# Altium PCB led.PcbDoc (part 1 of 2)
Units mm, origin at the board's own origin, x right, y up, seen from the top; angles counter-clockwise.
Board outline 15 x 336 mm, 2 copper layers (Top Layer, Bottom Layer); 132 components, 245 nets, 940 pads, 191 vias.
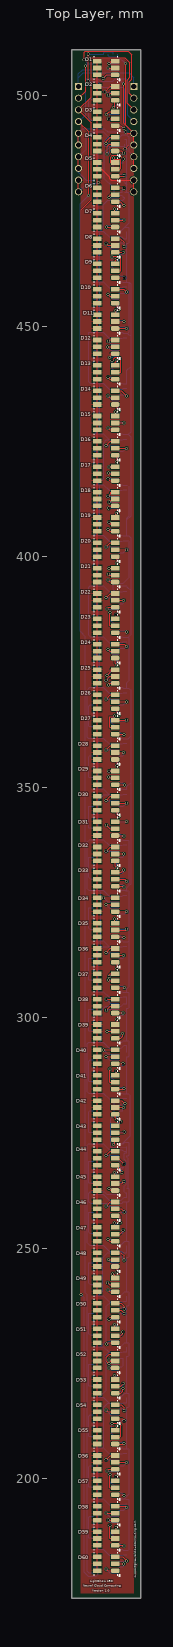
[diagram p0: Top Layer view]
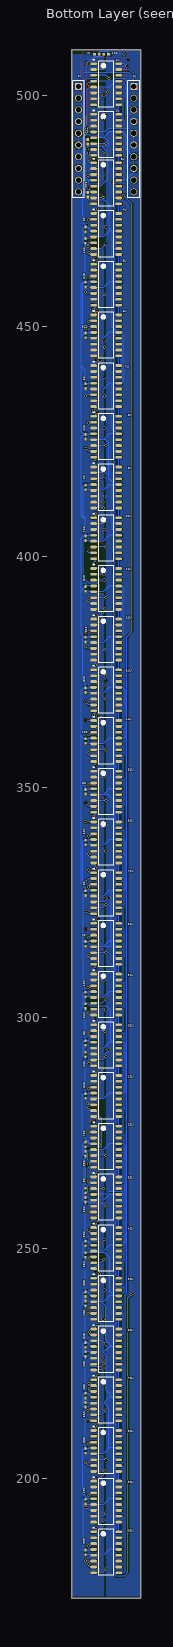
[diagram p1: Bottom Layer view, seen from below]

## Layer stack, top to bottom
Top Solder: solder mask 0.0102, Solder Resist, Dk 3.5
Top Layer: signal copper 0.0356
Dielectric 1: dielectric 0.32, FR-4, Dk 4.8
Bottom Layer: signal copper 0.0356
Bottom Solder: solder mask 0.0102, Solder Resist, Dk 3.5

## Board outline
1015.5,510 1015.5,174 1030.5,174 1030.5,510 1020,510

## Design rules (kind name [scope] priority, off if disabled: settings)
Clearance [All] p1: gap=0.127
PolygonConnect [All] p1: connectstyle=Relief reliefconductorwidth=0.254 reliefentries=4 polygonreliefangle="90 Angle" airgapwidth=0.254
RoomDefinition Sheet1 [InComponentClass('Sheet1')] p1: confinementstyle=ConfineIn formatcopy=TRUE lockcomponents=FALSE outline 0,0 50.8,0 50.8,25.4 0,25.4
RoutingLayers RoutingLayers_VCCBAT [InNet('VCCBAT')] p1 off: top layer_v5=TRUE bottom layer_v5=FALSE
RoutingLayers RoutingLayers_VCC [InNet('VCC')] p2 off: top layer_v5=TRUE bottom layer_v5=FALSE
RoutingLayers RoutingLayers_GND [InNet('GND')] p3 off: top layer_v5=FALSE bottom layer_v5=TRUE
RoutingLayers [All] p4: top layer_v5=TRUE bottom layer_v5=TRUE
RoutingVias [All] p1: holewidth=0.457 width=0.635 viastyle="Through Hole" minholewidth=0.457 minwidth=0.635 maxholewidth=0.457 maxwidth=0.635
SolderMaskExpansion [All] p1: expansion=0.102
Width [All] p1: maxlimit=0.254 minlimit=0.254 preferedwidth=0.254
29 further rules are at their usual default settings.

## Components (designator, comment, footprint, x,y, rotation, side; value= is the part's Value field where it differs from the comment)
C1 "Cap Semi" 0402 1025,509 r180 bottom
C2 "Cap Semi" 0402 1027.5,471 r270 bottom
C3 "Cap Semi" 0402 1027.5,437 r270 bottom
C4 "Cap Semi" 0402 1027.5,415 r270 bottom
C5 "Cap Semi" 0402 1027.5,327 r270 bottom
C6 "Cap Semi" 0402 1027.5,349 r270 bottom
C7 "Cap Semi" 0402 1027.5,316 r270 bottom
C8 "Cap Semi" 0402 1027.5,294.5 r270 bottom
C9 "Cap Semi" 0402 1027.5,262.5 r270 bottom
C10 "Cap Semi" 0402 1027.5,229 r270 bottom
C11 "Cap Semi" 0402 1023,509 r0 bottom
C12 "Cap Semi" 0402 1027,490 r90 bottom
C13 "Cap Semi" 0402 1027,478.5 r90 bottom
C14 "Cap Semi" 0402 1027.5,468.5 r270 bottom
C15 "Cap Semi" 0402 1027.5,459 r90 bottom
C16 "Cap Semi" 0402 1027.5,448 r90 bottom
C17 "Cap Semi" 0402 1027.5,404 r90 bottom
C18 "Cap Semi" 0402 1027.5,393 r90 bottom
C19 "Cap Semi" 0402 1027.5,382 r90 bottom
C20 "Cap Semi" 0402 1027.5,371 r90 bottom
C21 "Cap Semi" 0402 1027.5,360 r270 bottom
C22 "Cap Semi" 0402 1027.5,426 r270 bottom
C23 "Cap Semi" 0402 1027.5,338 r270 bottom
C24 "Cap Semi" 0402 1027.5,305 r270 bottom
C25 "Cap Semi" 0402 1027.5,292 r90 bottom
C26 "Cap Semi" 0402 1027.5,283 r270 bottom
C27 "Cap Semi" 0402 1027.5,272.5 r270 bottom
C28 "Cap Semi" 0402 1027.5,260.5 r90 bottom
C29 "Cap Semi" 0402 1027.5,251 r270 bottom
C30 "Cap Semi" 0402 1027.5,240 r270 bottom
C31 "Cap Semi" 0402 1027.5,227 r270 bottom
C32 "Cap Semi" 0402 1027.5,218 r90 bottom
C33 "Cap Semi" 0402 1027.5,206 r90 bottom
C34 "Cap Semi" 0402 1027.5,195 r90 bottom
C35 "Cap Semi" 0402 1027.5,184 r90 bottom
C36 "Cap Semi" 0402 1027.5,216 r270 bottom
C37 "Cap Semi" 0402 1027.5,238 r270 bottom
C38 "Cap Semi" 0402 1027.5,248.5 r270 bottom
C39 "Cap Semi" 0402 1027.5,270.5 r270 bottom
C40 "Cap Semi" 0402 1027.5,302.5 r270 bottom
D1 "Wayjun5050SMD" SON150P500X150_HS-7N 1023,506 r0 top
D2 "Wayjun5050SMD" SON150P500X150_HS-7N 1023,500.5 r0 top
D3 "Wayjun5050SMD" SON150P500X150_HS-7N 1023,495 r0 top
D4 "Wayjun5050SMD" SON150P500X150_HS-7N 1023,489.5 r0 top
D5 "Wayjun5050SMD" SON150P500X150_HS-7N 1023,484 r0 top
D6 "Wayjun5050SMD" SON150P500X150_HS-7N 1023,478.5 r0 top
D7 "Wayjun5050SMD" SON150P500X150_HS-7N 1023,473 r0 top
D8 "Wayjun5050SMD" SON150P500X150_HS-7N 1023,467.5 r0 top
D9 "Wayjun5050SMD" SON150P500X150_HS-7N 1023,462 r0 top
D10 "Wayjun5050SMD" SON150P500X150_HS-7N 1023,456.5 r0 top
D11 "Wayjun5050SMD" SON150P500X150_HS-7N 1023,451 r0 top
D12 "Wayjun5050SMD" SON150P500X150_HS-7N 1023,445.5 r0 top
D13 "Wayjun5050SMD" SON150P500X150_HS-7N 1023,440 r0 top
D14 "Wayjun5050SMD" SON150P500X150_HS-7N 1023,434.5 r0 top
D15 "Wayjun5050SMD" SON150P500X150_HS-7N 1023,429 r0 top
D16 "Wayjun5050SMD" SON150P500X150_HS-7N 1023,423.5 r0 top
D17 "Wayjun5050SMD" SON150P500X150_HS-7N 1023,418 r0 top
D18 "Wayjun5050SMD" SON150P500X150_HS-7N 1023,412.5 r0 top
D19 "Wayjun5050SMD" SON150P500X150_HS-7N 1023,407 r0 top
D20 "Wayjun5050SMD" SON150P500X150_HS-7N 1023,401.5 r0 top
D21 "Wayjun5050SMD" SON150P500X150_HS-7N 1023,396 r0 top
D22 "Wayjun5050SMD" SON150P500X150_HS-7N 1023,390.5 r0 top
D23 "Wayjun5050SMD" SON150P500X150_HS-7N 1023,385 r0 top
D24 "Wayjun5050SMD" SON150P500X150_HS-7N 1023,379.5 r0 top
D25 "Wayjun5050SMD" SON150P500X150_HS-7N 1023,374 r0 top
D26 "Wayjun5050SMD" SON150P500X150_HS-7N 1023,368.5 r0 top
D27 "Wayjun5050SMD" SON150P500X150_HS-7N 1023,363 r0 top
D28 "Wayjun5050SMD" SON150P500X150_HS-7N 1023,357.5 r0 top
D29 "Wayjun5050SMD" SON150P500X150_HS-7N 1023,352 r0 top
D30 "Wayjun5050SMD" SON150P500X150_HS-7N 1023,346.5 r0 top
D31 "Wayjun5050SMD" SON150P500X150_HS-7N 1023,341 r0 top
D32 "Wayjun5050SMD" SON150P500X150_HS-7N 1023,335.5 r0 top
D33 "Wayjun5050SMD" SON150P500X150_HS-7N 1023,330 r0 top
D34 "Wayjun5050SMD" SON150P500X150_HS-7N 1023,324.5 r0 top
D35 "Wayjun5050SMD" SON150P500X150_HS-7N 1023,319 r0 top
D36 "Wayjun5050SMD" SON150P500X150_HS-7N 1023,313.5 r0 top
D37 "Wayjun5050SMD" SON150P500X150_HS-7N 1023,308 r0 top
D38 "Wayjun5050SMD" SON150P500X150_HS-7N 1023,302.5 r0 top
D39 "Wayjun5050SMD" SON150P500X150_HS-7N 1023,297 r0 top
D40 "Wayjun5050SMD" SON150P500X150_HS-7N 1023,291.5 r0 top
D41 "Wayjun5050SMD" SON150P500X150_HS-7N 1023,286 r0 top
D42 "Wayjun5050SMD" SON150P500X150_HS-7N 1023,280.5 r0 top
D43 "Wayjun5050SMD" SON150P500X150_HS-7N 1023,275 r0 top
D44 "Wayjun5050SMD" SON150P500X150_HS-7N 1023,269.5 r0 top
D45 "Wayjun5050SMD" SON150P500X150_HS-7N 1023,264 r0 top
D46 "Wayjun5050SMD" SON150P500X150_HS-7N 1023,258.5 r0 top
D47 "Wayjun5050SMD" SON150P500X150_HS-7N 1023,253 r0 top
D48 "Wayjun5050SMD" SON150P500X150_HS-7N 1023,247.5 r0 top
D49 "Wayjun5050SMD" SON150P500X150_HS-7N 1023,242 r0 top
D50 "Wayjun5050SMD" SON150P500X150_HS-7N 1023,236.5 r0 top
D51 "Wayjun5050SMD" SON150P500X150_HS-7N 1023,231 r0 top
D52 "Wayjun5050SMD" SON150P500X150_HS-7N 1023,225.5 r0 top
D53 "Wayjun5050SMD" SON150P500X150_HS-7N 1023,220 r0 top
D54 "Wayjun5050SMD" SON150P500X150_HS-7N 1023,214.5 r0 top
D55 "Wayjun5050SMD" SON150P500X150_HS-7N 1023,209 r0 top
D56 "Wayjun5050SMD" SON150P500X150_HS-7N 1023,203.5 r0 top
D57 "Wayjun5050SMD" SON150P500X150_HS-7N 1023,198 r0 top
D58 "Wayjun5050SMD" SON150P500X150_HS-7N 1023,192.5 r0 top
D59 "Wayjun5050SMD" SON150P500X150_HS-7N 1023,187 r0 top
D60 "Wayjun5050SMD" SON150P500X150_HS-7N 1023,181.5 r0 top
J1 "PPTC101LFBN-RC" PPTC101LFBN-RC 1017,502 r270 bottom
J2 "PPTC101LFBN-RC" PPTC101LFBN-RC 1029,502 r270 bottom
U1 "LPD8806" SOP127P600-8N 1023,502.5 r180 bottom
U2 "LPD8806" SOP127P600-8N 1023,491.5 r180 bottom
U3 "LPD8806" SOP127P600-8N 1023,481 r180 bottom
U4 "LPD8806" SOP127P600-8N 1023,470 r180 bottom
U5 "LPD8806" SOP127P600-8N 1023,459 r180 bottom
U6 "LPD8806" SOP127P600-8N 1023,448 r180 bottom
U7 "LPD8806" SOP127P600-8N 1023,437 r180 bottom
U8 "LPD8806" SOP127P600-8N 1023,426 r180 bottom
U9 "LPD8806" SOP127P600-8N 1023,415 r180 bottom
U10 "LPD8806" SOP127P600-8N 1023,404 r180 bottom
U11 "LPD8806" SOP127P600-8N 1023,393 r180 bottom
U12 "LPD8806" SOP127P600-8N 1023,382 r180 bottom
U13 "LPD8806" SOP127P600-8N 1023,371 r180 bottom
U14 "LPD8806" SOP127P600-8N 1023,360 r180 bottom
U15 "LPD8806" SOP127P600-8N 1023,349 r180 bottom
U16 "LPD8806" SOP127P600-8N 1023,338 r180 bottom
U17 "LPD8806" SOP127P600-8N 1023,327 r180 bottom
U18 "LPD8806" SOP127P600-8N 1023,316 r180 bottom
U19 "LPD8806" SOP127P600-8N 1023,305 r180 bottom
U20 "LPD8806" SOP127P600-8N 1023,294 r180 bottom
U21 "LPD8806" SOP127P600-8N 1023,283 r180 bottom
U22 "LPD8806" SOP127P600-8N 1023,272 r180 bottom
U23 "LPD8806" SOP127P600-8N 1023,261 r180 bottom
U24 "LPD8806" SOP127P600-8N 1023,250 r180 bottom
U25 "LPD8806" SOP127P600-8N 1023,239 r180 bottom
U26 "LPD8806" SOP127P600-8N 1023,228 r180 bottom
U27 "LPD8806" SOP127P600-8N 1023,217 r180 bottom
U28 "LPD8806" SOP127P600-8N 1023,206 r180 bottom
U29 "LPD8806" SOP127P600-8N 1023,195 r180 bottom
U30 "LPD8806" SOP127P600-8N 1023,184 r180 bottom

## Footprints (in the part's own frame and the unit in brackets; to place one, negate y for a bottom-side part, rotate by r counter-clockwise, add the part's x,y. Pads: shape width x height; smd on the part's side, far side on the other; paste and mask are expansions set on the pad)
0402 [mm] "Chip Capacitor, Body 1.0x0.5mm, IPC High Density"
  rect 0.6x0.5 smd: 1(-0.5,0) 2(0.5,0)
  body extent -0.55,-0.3 0.55,0.3, height 1.3
PPTC101LFBN-RC [mil] "Sullins 10 Pin .100 spacing Femal connector - Single Role"
  rect 60x60 hole 45: 1(0,0)
  round 60 hole 45: 2(100,0) 3(200,0) 4(300,0) 5(400,0) 6(500,0) 7(600,0) 8(700,0) 9(800,0) 10(900,0)
  silkscreen extent -50,-50 950,50
SON150P500X150_HS-7N [mm] "SON, 6-Leads, Body 5.00x5.00mm, Pitch 1.50mm, Thermal Pad 4.00x1.50mm, IPC Medium Density"
  rrect50% 1.8x1 smd: 1(1.96,-1.5)
  rect 1.8x1 smd: 2(1.96,0) 3(1.96,1.5) 4(-1.96,1.5) 5(-1.96,0) 6(-1.96,-1.5)
  silkscreen extent -2.54,-2.72 3.1,2.54
SOP127P600-8N [mm]
  oval 1.45x0.6 smd: 1(-2.725,4.445) 2(-2.725,3.175) 3(-2.725,1.905) 4(-2.725,0.635) 5(-2.725,-0.635) 6(-2.725,-1.905) 7(-2.725,-3.175) 8(-2.725,-4.445) 9(2.725,-4.445) 10(2.725,-3.175) 11(2.725,-1.905) 12(2.725,-0.635) 13(2.725,0.635) 14(2.725,1.905) 15(2.725,3.175) 16(2.725,4.445)
  silkscreen extent -2.85,-5 1.6,5.42, body extent -2,-5 2,5, height 1.75

## Part data
C1 C2 C3 C4 C5 C6 C7 C8 C9 C10 C11 C12 C13 C14 C15 C16 C17 C18 C19 C20 C21 C22 C23 C24 C25 C26 C27 C28 C29 C30 C31 C32 C33 C34 C35 C36 C37 C38 C39 C40: "Capacitor (Semiconductor SIM Model)"
J1 J2: "Sullins PPTC101LFBN-RC 10 Position Header Connector 0.100\" (2.54mm) Through Hole Tin"
U1 U2 U3 U4 U5 U6 U7 U8 U9 U10 U11 U12 U13 U14 U15 U16 U17 U18 U19 U20 U21 U22 U23 U24 U25 U26 U27 U28 U29 U30: "LPD8806 LED Driver"

## Via types
v1: diameter 0.635, hole 0.457, Top Layer to Bottom Layer, 191 vias

## Nets (pads, with @x,y where several pads share a name; then routed paths per layer and width w, separated by ;. In a path a pad name is that pad's centre, name@x,y a point inside that pad or via, vN(x,y) a via of type N, cw(c..) or ccw(c..) an arc to the next point about the centre after c; other vN are vias at no path point)
CLK0: J1.2 J2.2 U1.16 | length 33.1
  Top Layer w0.254: J1.2@1017,499.46 1018.54,501 v1(1018.54,506.425) ; v1(1018.21,507.797) 1018.21,509.372 1018.438,509.6 1027.786,509.6 1028.548,508.838 1028.548,503.53 1027.984,502.966 1027.984,500.476 J2.2@1029,499.46
  Bottom Layer w0.254: v1(1018.21,507.797) 1019.062,506.945 ; v1(1018.54,506.425) 1019.062,506.945 ; U1.16@1020.275,506.945 1019.062,506.945
CLK11: U10.9 U11.16 | length 2.1
  Bottom Layer w0.254: U11.16@1020.275,397.445 U10.9@1020.275,399.555
CLK21: U20.9 U21.16 | length 2.1
  Bottom Layer w0.254: U21.16@1020.275,287.445 U20.9@1020.275,289.555
CLK31: J1.4 J2.4 U30.9 | length 347.4
  Top Layer w0.254: J1.4@1017,494.38 1019.213,492.167 v1(1019.213,478.386)
  Bottom Layer w0.254: J1.4@1017,494.38 1018.534,495.914 1018.534,503.409 1018.845,503.72 1021.232,503.72 1021.791,503.161 1024.471,503.161 1025.017,503.707 1027.308,503.707 1027.633,503.382 1027.633,495.747 J2.4@1029,494.38 ; v1(1019.213,478.386) 1017.397,476.57 1017.397,383.79 1018.515,382.672 1018.515,240.259 1018.896,239.878 1018.896,179.86 1019.2,179.555 U30.9@1020.275,179.555
DAT0: J1.1 J2.1 U1.15 | length 21.2
  Bottom Layer w0.254: J1.1@1017,502 1017,503.936 ; U1.15@1020.275,505.675 1017.926,505.675 1017,504.749 1017,503.936 ; J2.1@1029,502 1029,503.936 1027.959,504.977 1018.041,504.977 1017,503.936
DAT11: U10.10 U11.15 | length 6.6
  Bottom Layer w0.254: U11.15@1020.275,396.175 1021.258,396.175 1021.258,400.825 U10.10@1020.275,400.825
DAT21: U20.10 U21.15 | length 6.5
  Bottom Layer w0.254: U21.15@1020.275,286.175 1019.277,286.175 1019.277,290.576 1019.526,290.825 U20.10@1020.275,290.825
DAT31: J1.3 J2.3 U30.10 | length 358.1
  Top Layer w0.254: v1(1017.575,239.903) 1017.575,475.209 1019.785,477.418 1019.785,494.135 J1.3@1017,496.92 1019.734,499.654 1019.734,508.127 1019.886,508.279 1027.074,508.279 1028.167,507.187 1028.167,503.961 1027.603,503.397 1027.603,498.317 J2.3@1029,496.92
  Bottom Layer w0.254: v1(1017.575,239.903) 1018.261,239.217 1018.261,179.629 1019.124,178.765 1020.801,178.765 1021.258,179.222 1021.258,180.825 U30.10@1020.275,180.825
GND: C1.2 C2.2 C3.2 C4.2 C5.2 C6.2 C7.2 C8.2 C9.2 C10.2 C11.1 C12.1 C13.1 C14.1 C15.1 C16.1 C17.1 C18.1 C19.1 C20.1 C21.2 C22.2 C23.2 C24.2 C25.2 C26.2 C27.2 C28.2 C29.2 C30.2 C31.1 C32.1 C33.1 C34.1 C35.1 C36.1 C37.1 C38.1 C39.1 C40.1 J1.7 J1.8 J2.7 J2.8 U1.5 U1.13 U2.5 U2.13 U3.5 U3.13 U4.5 U4.13 U5.5 U5.13 U6.5 U6.13 U7.5 U7.13 U8.5 U8.13 U9.5 U9.13 U10.5 U10.13 U11.5 U11.13 U12.5 U12.13 U13.5 U13.13 U14.5 U14.13 U15.5 U15.13 U16.5 U16.13 U17.5 U17.13 U18.5 U18.13 U19.5 U19.13 U20.5 U20.13 U21.5 U21.13 U22.5 U22.13 U23.5 U23.13 U24.5 U24.13 U25.5 U25.13 U26.5 U26.13 U27.5 U27.13 U28.5 U28.13 U29.5 U29.13 U30.5 U30.13 | length 646.1
  Top Layer w0.254: J1.8@1017,484.22 J1.7@1017,486.76 ; v1(1019.124,503.149) v1(1019.124,509) ; J2.8@1029,484.22 J2.7@1029,486.76
  Bottom Layer w0.254: J1.8@1017,484.22 1017,483.353 1018.718,481.635 U3.13@1020.275,481.635 ; J1.7@1017,486.76 1018.642,488.402 1018.642,491.322 1019.454,492.135 U2.13@1020.275,492.135 1022.35,492.135 1023.62,490.865 ; v1(1019.124,503.149) 1019.138,503.135 U1.13@1020.275,503.135 1021.034,503.135 1022.304,501.865 U1.5@1025.725,501.865 1026.566,501.865 1027.085,501.346 1027.085,493.782 1027.841,493.026 1027.841,491.812 1027.582,491.553 1027.341,491.553 ; v1(1019.124,509) C11.1@1022.5,509 1022.5,509.318 1022.706,509.524 1024.5,509.524 C1.2@1024.5,509 ; U30.13@1020.275,184.635 1021.258,184.635 ; U29.13@1020.275,195.635 1021.008,195.635 ; U28.13@1020.275,206.635 1021.258,206.635 ; U27.13@1020.275,217.635 1021.537,217.635 ; U26.13@1020.275,228.635 1021.69,228.635 ; U25.13@1020.275,239.635 1021.295,239.635 ; U23.13@1020.275,261.635 1022.35,261.635 1023.62,260.365 U23.5@1025.725,260.365 1026.287,260.365 1026.922,261 C28.2@1027.5,261 C9.2@1027.5,262 1027.176,262 1026.973,262.203 1026.973,263.448 1027.415,263.891 1027.415,268.871 1026.973,269.313 1026.973,270.485 1027.176,270.688 1027.5,270.688 C39.1@1027.5,271 ; U19.13@1020.275,305.635 1021.258,305.635 ; U18.13@1020.275,316.635 1021.005,316.635 ; U15.13@1020.275,349.635 1021.258,349.635 ; U10.13@1020.275,404.635 U10.13@1020.382,404.635 ; U9.13@1020.275,415.635 1021.095,415.635 ; U8.13@1020.275,426.635 U8.13@1020.487,426.635 ; U5.13@1020.275,459.635 1021.229,459.635 ; U4.13@1020.275,470.635 1021.209,470.635 ; U3.5@1025.725,480.365 1024.941,480.365 ; C12.1@1027,489.5 1027,489.052 1026.551,489.052 1026.525,489.026 1023.976,489.026 ; C35.1@1027.5,183.5 1026.676,183.5 1026.541,183.365 U30.5@1025.725,183.365 1023.62,183.365 1022.35,184.635 1021.258,184.635 ; C34.1@1027.5,194.5 1027.377,194.5 1027.377,194.365 U29.5@1025.725,194.365 1023.62,194.365 1022.35,195.635 1021.258,195.635 ; C33.1@1027.5,205.5 1026.676,205.5 1026.541,205.365 U28.5@1025.725,205.365 1023.62,205.365 1022.426,206.559 ; C32.1@1027.5,217.5 C36.1@1027.5,216.5 1026.676,216.5 1026.541,216.365 U27.5@1025.725,216.365 1023.62,216.365 ; C10.2@1027.5,228.5 C31.1@1027.5,227.5 1026.676,227.5 1026.541,227.365 U26.5@1025.725,227.365 1023.655,227.365 ; C30.2@1027.5,239.5 C37.1@1027.5,238.5 1026.676,238.5 1026.541,238.365 U25.5@1025.725,238.365 1024.089,238.365 ; C29.2@1027.5,250.5 C38.1@1027.5,249 1026.779,249 ; C26.2@1027.5,282.5 1026.541,282.5 ; C25.2@1027.5,292.5 C8.2@1027.5,294 1026.922,294 1026.287,293.365 U20.5@1025.725,293.365 1023.62,293.365 1022.35,294.635 1021.558,294.635 ; C7.2@1027.5,315.5 1026.676,315.5 1026.541,315.365 U18.5@1025.725,315.365 1023.62,315.365 ; C5.2@1027.5,326.5 1026.676,326.5 1026.541,326.365 U17.5@1025.725,326.365 1023.62,326.365 1022.35,327.635 1021.359,327.635 ; C23.2@1027.5,337.5 1026.676,337.5 1026.541,337.365 U16.5@1025.725,337.365 1023.62,337.365 1022.35,338.635 1021.258,338.635 ; C6.2@1027.5,348.5 1026.676,348.5 1026.541,348.365 U15.5@1025.725,348.365 1023.62,348.365 ; C21.2@1027.5,359.5 1026.676,359.5 1026.541,359.365 U14.5@1025.725,359.365 1023.62,359.365 1022.35,360.635 1021.258,360.635 ; C20.1@1027.5,370.5 1026.676,370.5 1026.541,370.365 U13.5@1025.725,370.365 1023.62,370.365 1022.35,371.635 U13.13@1020.478,371.635 ; C19.1@1027.5,381.5 1026.676,381.5 1026.541,381.365 U12.5@1025.725,381.365 1023.62,381.365 1022.35,382.635 1021.02,382.635 ; C18.1@1027.5,392.5 1026.676,392.5 1026.541,392.365 U11.5@1025.725,392.365 1024.941,392.365 ; C4.2@1027.5,414.5 1026.676,414.5 1026.541,414.365 U9.5@1025.725,414.365 1023.62,414.365 1022.35,415.635 1021.345,415.635 ; C22.2@1027.5,425.5 1026.676,425.5 1026.541,425.365 U8.5@1025.725,425.365 1023.62,425.365 ; C3.2@1027.5,436.5 1026.676,436.5 1026.541,436.365 U7.5@1025.725,436.365 1023.62,436.365 1022.35,437.635 1021.29,437.635 ; C16.1@1027.5,447.5 1026.676,447.5 1026.541,447.365 U6.5@1025.725,447.365 1023.62,447.365 1022.35,448.635 U6.13@1020.491,448.635 ; C15.1@1027.5,458.5 1026.676,458.5 1026.541,458.365 U5.5@1025.725,458.365 1023.62,458.365 1022.35,459.635 1021.283,459.635 ; C2.2@1027.5,470.5 C14.1@1027.5,469 1026.779,469 1026.414,469.365 U4.5@1025.725,469.365 1023.62,469.365 1022.35,470.635 1021.69,470.635 ; J2.7@1029,486.76 1027.963,487.797 1027.963,490.931 1027.341,491.553 ; U10.13@1020.382,404.635 1022.35,404.635 1023.62,403.365 U10.5@1025.725,403.365 1026.541,403.365 1026.676,403.5 C17.1@1027.5,403.5 1027.786,403.5 1028.014,403.271 1028.014,395.503 1026.719,394.208 1024.803,394.208 1024.534,393.94 1024.534,392.771 1024.941,392.365 ; U10.13@1020.382,404.635 1021.639,405.892 1021.639,415.341 1021.345,415.635 ; U13.13@1020.478,371.635 U13.13@1020.275,371.635 1019.487,371.635 1018.896,371.043 1018.896,360.864 1019.124,360.635 U14.13@1020.275,360.635 1021.258,360.635 ; U13.13@1020.478,371.635 1021.639,372.796 1021.639,382.016 1021.02,382.635 ; U8.13@1020.487,426.635 1022.35,426.635 1023.62,425.365 ; U8.13@1020.487,426.635 1021.639,427.787 1021.639,437.286 1021.29,437.635 ; U6.13@1020.491,448.635 U6.13@1020.275,448.635 1019.277,448.635 1019.277,437.896 1019.538,437.635 U7.13@1020.275,437.635 1021.29,437.635 ; U6.13@1020.491,448.635 1021.639,449.783 1021.639,459.279 1021.283,459.635 ; 1021.005,316.635 1021.842,316.635 ; 1021.005,316.635 1021.258,316.382 1021.258,305.635 ; 1021.008,195.635 1021.258,195.635 ; 1021.008,195.635 1021.258,195.885 1021.258,206.635 ; 1021.02,382.635 U12.13@1020.275,382.635 1019.538,382.635 1019.277,382.896 1019.277,393.395 1019.516,393.635 U11.13@1020.275,393.635 1022.35,393.635 1023.62,392.365 1024.941,392.365 ; 1021.095,415.635 1021.345,415.635 ; 1021.095,415.635 1022.426,416.966 1022.426,424.739 1023.052,425.365 1023.62,425.365 ; 1021.209,470.635 1021.69,470.635 ; 1021.209,470.635 1021.639,470.205 1021.639,460.045 1021.229,459.635 ; 1021.229,459.635 1021.283,459.635 ; 1021.258,184.635 1021.258,195.635 ; 1021.258,206.635 1022.35,206.635 1022.426,206.559 ; 1021.258,305.635 1022.35,305.635 1023.62,304.365 U19.5@1025.725,304.365 1026.541,304.365 1026.676,304.5 C24.2@1027.5,304.5 C40.1@1027.5,303 1026.846,303 1026.309,302.463 1022.883,302.463 1021.969,301.549 1021.969,295.046 1021.558,294.635 ; 1021.258,338.635 U16.13@1020.275,338.635 1019.406,338.635 1018.896,338.125 1018.896,327.965 1019.225,327.635 U17.13@1020.275,327.635 1021.359,327.635 ; 1021.258,338.635 1021.258,347.116 1022.506,348.365 1023.62,348.365 ; 1021.258,349.635 1022.35,349.635 1023.62,348.365 ; 1021.258,349.635 1021.258,360.635 ; 1021.295,239.635 1022.35,239.635 1023.62,238.365 1024.089,238.365 ; 1021.295,239.635 1022.248,240.589 1022.248,247.933 1023.315,249 1026.779,249 ; 1021.359,327.635 1021.842,327.152 1021.842,316.635 ; 1021.537,217.635 1022.35,217.635 1023.62,216.365 ; 1021.537,217.635 1023.023,219.121 1023.023,226.733 1023.655,227.365 ; 1021.558,294.635 U20.13@1020.275,294.635 1019.251,294.635 1018.896,294.279 1018.896,283.94 1019.2,283.635 U21.13@1020.275,283.635 1022.35,283.635 1023.62,282.365 U21.5@1025.725,282.365 1026.541,282.5 ; 1021.69,228.635 1022.35,228.635 1023.655,227.365 ; 1021.69,228.635 1023.061,230.007 1023.061,237.338 1024.089,238.365 ; 1021.69,470.635 1022.375,471.321 1022.375,476.326 1023.315,477.266 1026.566,477.266 1027,477.7 C13.1@1027,478 1026.719,478 1026.719,478.13 1026.414,478.434 1024.941,478.434 1024.738,478.638 1024.738,480.162 1024.941,480.365 ; 1021.842,316.635 1022.35,316.635 1023.62,315.365 ; 1021.842,316.635 1021.842,315.619 1022.096,315.365 1023.62,315.365 ; 1022.426,206.559 1022.426,215.476 1023.315,216.365 1023.62,216.365 ; 1023.62,490.865 U2.5@1025.725,490.865 1025.84,490.865 1026.528,491.553 1027.341,491.553 ; 1023.62,490.865 1023.315,490.865 1022.426,489.976 1022.426,489.306 1022.706,489.026 1023.976,489.026 ; 1023.976,489.026 1022.629,487.68 1022.629,482.016 1024.28,480.365 1024.941,480.365 ; 1026.541,282.5 1025.754,282.365 1025.737,282.351 1024.738,281.484 1024.738,278.808 1023.984,278.055 1023.984,271.92 1025.047,271.92 C27.2@1027.5,272 C39.1@1027.5,271 ; 1026.779,249 1026.414,249.365 U24.5@1025.725,249.365 1023.62,249.365 1022.35,250.635 U24.13@1020.275,250.635 1019.416,250.635 1018.896,251.155 1018.896,272.288 1019.243,272.635 U22.13@1020.275,272.635 1022.35,272.635 1023.62,271.365 U22.5@1025.725,271.365 1026.414,271.365 1026.779,271 C39.1@1027.5,271
NetD1_1: D1.1 U1.3 | length 6.5
  Top Layer w0.254: v1(1022.375,503.733) 1023.143,504.5 D1.1@1024.96,504.5
  Bottom Layer w0.254: v1(1022.375,503.733) 1023.048,504.405 U1.3@1025.725,504.405
NetD1_2: D1.2 U1.2 | length 4
  Top Layer w0.254: v1(1023.398,506) D1.2@1024.96,506
  Bottom Layer w0.254: v1(1023.398,506) 1023.723,505.675 U1.2@1025.725,505.675
NetD1_3: D1.3 U1.1 | length 3.7
  Top Layer w0.254: v1(1023.595,506.945) 1024.15,507.5 D1.3@1024.96,507.5
  Bottom Layer w0.254: v1(1023.595,506.945) U1.1@1025.725,506.945
NetD2_1: D2.1 U1.8 | length 3.1
  Top Layer w0.254: v1(1024.611,497.459) 1024.839,497.688 1024.839,499 D2.1@1024.96,499
  Bottom Layer w0.254: v1(1024.611,497.459) 1024.7,497.459 1025.296,498.055 U1.8@1025.725,498.055
NetD2_2: D2.2 U1.7 | length 4.2
  Top Layer w0.254: v1(1023.493,500.094) 1023.899,500.5 D2.2@1024.96,500.5
  Bottom Layer w0.254: v1(1023.493,500.094) 1024.262,499.325 U1.7@1025.725,499.325
NetD2_3: D2.3 U1.6 | length 5.9
  Top Layer w0.254: v1(1022.706,500.786) 1023.919,502 D2.3@1024.96,502
  Bottom Layer w0.254: v1(1022.706,500.786) 1023.874,500.786 1024.065,500.595 U1.6@1025.725,500.595
NetD3_1: D3.1 U2.3 | length 3.4
  Top Layer w0.254: D3.1@1024.96,493.5 1026.207,493.5 v1(1026.82,492.887)
  Bottom Layer w0.254: U2.3@1025.725,493.405 1026.302,493.405 v1(1026.82,492.887)
NetD3_2: D3.2 U2.2 | length 3.7
  Top Layer w0.254: v1(1023.554,495) D3.2@1024.96,495
  Bottom Layer w0.254: v1(1023.554,495) 1023.879,494.675 U2.2@1025.725,494.675
NetD3_3: D3.3 U2.1 | length 4.7
  Top Layer w0.254: v1(1023.087,495.945) 1023.642,496.5 D3.3@1024.96,496.5
  Bottom Layer w0.254: v1(1023.087,495.945) U2.1@1025.725,495.945
NetD4_1: D4.1 U2.8 | length 3.4
  Top Layer w0.254: D4.1@1024.96,488 1026.297,488 v1(1026.795,487.502)
  Bottom Layer w0.254: U2.8@1025.725,487.055 1026.795,487.274 v1(1026.795,487.502)
NetD4_2: D4.2 U2.7 | length 6.5
  Top Layer w0.254: v1(1023.214,487.375) 1023.214,488.992 1023.722,489.5 D4.2@1024.96,489.5
  Bottom Layer w0.254: v1(1023.214,487.375) 1024.163,488.325 U2.7@1025.725,488.325
NetD4_3: D4.3 U2.6 | length 5.5
  Top Layer w0.254: v1(1023.01,489.61) 1023.01,490.118 1023.892,491 D4.3@1024.96,491
  Bottom Layer w0.254: v1(1023.01,489.61) 1023.026,489.595 U2.6@1025.725,489.595
NetD5_1: D5.1 U3.3 | length 3.3
  Top Layer w0.254: D5.1@1024.96,482.5 1026.72,482.5 v1(1026.922,482.702)
  Bottom Layer w0.254: U3.3@1025.725,482.905 1026.719,482.905 v1(1026.922,482.702)
NetD5_2: D5.2 U3.2 | length 8.3
  Top Layer w0.254: v1(1024.56,486.461) 1024.763,486.258 1026.135,486.258 1026.135,484.226 1025.909,484 D5.2@1024.96,484
  Bottom Layer w0.254: v1(1024.56,486.461) 1024.56,484.429 1024.814,484.175 U3.2@1025.725,484.175
NetD5_3: D5.3 U3.1 | length 7.2
  Top Layer w0.254: D5.3@1024.96,485.5 1023.976,485.5 1023.976,486.689 1024.331,487.045 1025.931,487.045 v1(1026.719,486.258)
  Bottom Layer w0.254: U3.1@1025.725,485.445 1026.719,485.445 v1(1026.719,486.258)
NetD6_1: D6.1 U3.8 | length 3.5
  Top Layer w0.254: D6.1@1024.96,477 1026.02,477 v1(1026.846,476.174)
  Bottom Layer w0.254: U3.8@1025.725,476.555 1026.465,476.555 v1(1026.846,476.174)
NetD6_2: D6.2 U3.7 | length 3.8
  Top Layer w0.254: v1(1023.645,477.952) 1023.645,478.221 1023.925,478.5 D6.2@1024.96,478.5
  Bottom Layer w0.254: v1(1023.645,477.952) 1023.772,477.825 U3.7@1025.725,477.825
NetD6_3: D6.3 U3.6 | length 3.6
  Top Layer w0.254: D6.3@1024.96,480 1026.728,480 v1(1026.82,479.908)
  Bottom Layer w0.254: U3.6@1025.725,479.095 1026.439,479.095 1026.439,479.527 v1(1026.82,479.908)
NetD7_1: D7.1 U4.3 | length 4.7
  Top Layer w0.254: v1(1023.087,471.5) D7.1@1024.96,471.5
  Bottom Layer w0.254: v1(1023.087,471.5) 1023.492,471.905 U4.3@1025.725,471.905
NetD7_2: D7.2 U4.2 | length 3.1
  Top Layer w0.254: D7.2@1024.96,473 v1(1026.847,473)
  Bottom Layer w0.254: U4.2@1025.725,473.175 1026.672,473.175 v1(1026.847,473)
NetD7_3: D7.3 U4.1 | length 2.7
  Top Layer w0.254: v1(1024.839,475.412) 1024.839,474.5 D7.3@1024.96,474.5
  Bottom Layer w0.254: v1(1024.839,475.412) 1024.966,475.412 1025.296,475.082 1025.296,474.445 U4.1@1025.725,474.445
NetD8_1: D8.1 U4.8 | length 3.2
  Top Layer w0.254: D8.1@1024.96,466 v1(1026.719,466)
  Bottom Layer w0.254: U4.8@1025.725,465.555 1026.719,465.555 v1(1026.719,466)
NetD8_2: D8.2 U4.7 | length 5.2
  Top Layer w0.254: v1(1023.01,467.868) 1023.378,467.5 D8.2@1024.96,467.5
  Bottom Layer w0.254: v1(1023.01,467.868) 1024.053,466.825 U4.7@1025.725,466.825
NetD8_3: D8.3 U4.6 | length 5.1
  Top Layer w0.254: D8.3@1024.96,469 1026.095,469 1026.922,468.173 v1(1026.922,467.258)
  Bottom Layer w0.254: U4.6@1025.725,468.095 1026.643,468.095 1026.922,467.816 v1(1026.922,467.258)
NetD9_1: D9.1 U5.3 | length 3.3
  Top Layer w0.254: D9.1@1024.96,460.5 v1(1026.922,460.5)
  Bottom Layer w0.254: U5.3@1025.725,460.905 1026.517,460.905 v1(1026.922,460.5)
NetD9_2: D9.2 U5.2 | length 10.1
  Top Layer w0.254: v1(1024.306,464.998) 1024.522,465.214 1026.035,465.214 1026.135,465.114 1026.135,462 D9.2@1024.96,462
  Bottom Layer w0.254: v1(1024.306,464.998) 1024.306,462.81 1024.941,462.175 U5.2@1025.725,462.175
NetD9_3: D9.3 U5.1 | length 2.7
  Top Layer w0.254: D9.3@1024.96,463.5 1024.941,463.5 1024.941,464.21 v1(1025.373,464.642)
  Bottom Layer w0.254: v1(1025.373,464.642) 1025.398,464.642 1025.728,464.312 1025.728,463.445 U5.1@1025.725,463.445
NetD10_1: D10.1 U5.8 | length 3.4
  Top Layer w0.254: D10.1@1024.96,455 1025.373,455 1025.373,454.05 v1(1025.779,453.644)
  Bottom Layer w0.254: U5.8@1025.725,454.555 1025.373,454.555 1025.373,453.965 1025.694,453.644 v1(1025.779,453.644)
NetD10_2: D10.2 U5.7 | length 4.5
  Top Layer w0.254: v1(1023.391,456.87) 1023.761,456.5 D10.2@1024.96,456.5
  Bottom Layer w0.254: v1(1023.391,456.87) 1024.436,455.825 U5.7@1025.725,455.825
NetD10_3: D10.3 U5.6 | length 4.6
  Top Layer w0.254: D10.3@1024.96,458 1026.859,458 v1(1027.455,457.403)
  Bottom Layer w0.254: U5.6@1025.725,457.095 1027.147,457.095 v1(1027.455,457.403)
NetD11_1: D11.1 U6.3 | length 4.4
  Top Layer w0.254: D11.1@1024.96,449.5 v1(1027.455,449.5)
  Bottom Layer w0.254: U6.3@1025.725,449.905 1027.05,449.905 v1(1027.455,449.5)
NetD11_2: D11.2 U6.2 | length 3.1
  Top Layer w0.254: D11.2@1024.96,451 v1(1026.843,451)
  Bottom Layer w0.254: U6.2@1025.725,451.175 1026.668,451.175 v1(1026.843,451)
NetD11_3: D11.3 U6.1 | length 2.5
  Top Layer w0.254: D11.3@1024.96,452.5 1025.042,452.5 v1(1025.042,453.415)
  Bottom Layer w0.254: v1(1025.042,453.415) 1025.296,453.161 1025.296,452.445 U6.1@1025.725,452.445
NetD12_1: D12.1 U6.8 | length 4
  Top Layer w0.254: v1(1023.747,443.205) 1023.899,443.357 1023.899,444 D12.1@1024.96,444
  Bottom Layer w0.254: v1(1023.747,443.205) 1024.463,443.205 1024.814,443.555 U6.8@1025.725,443.555
NetD12_2: D12.2 U6.7 | length 4.3
  Top Layer w0.254: v1(1023.315,445.5) D12.2@1024.96,445.5
  Bottom Layer w0.254: v1(1023.315,445.5) 1023.99,444.825 U6.7@1025.725,444.825
NetD12_3: D12.3 U6.6 | length 4.1
  Top Layer w0.254: v1(1023.483,446.725) 1023.758,447 D12.3@1024.96,447
  Bottom Layer w0.254: v1(1023.483,446.725) 1024.113,446.095 U6.6@1025.725,446.095
NetD13_1: D13.1 U7.3 | length 4
  Top Layer w0.254: v1(1023.411,438.905) 1023.816,438.5 D13.1@1024.96,438.5
  Bottom Layer w0.254: v1(1023.411,438.905) U7.3@1025.725,438.905
NetD13_2: D13.2 U7.2 | length 9.9
  Top Layer w0.254: v1(1024.306,442.595) 1024.928,443.217 1026.049,443.217 1026.135,443.131 1026.135,440 D13.2@1024.96,440
  Bottom Layer w0.254: v1(1024.306,442.595) 1024.306,440.81 1024.941,440.175 U7.2@1025.725,440.175
NetD13_3: D13.3 U7.1 | length 2.9
  Top Layer w0.254: D13.3@1024.96,441.5 1024.941,441.5 1024.941,442.214 v1(1025.373,442.646)
  Bottom Layer w0.254: v1(1025.373,442.646) 1025.373,441.445 U7.1@1025.725,441.445
NetD14_1: D14.1 U7.8 | length 3.4
  Top Layer w0.254: D14.1@1024.96,433 1025.373,433 1025.373,432.054 v1(1025.779,431.648)
  Bottom Layer w0.254: U7.8@1025.725,432.555 1025.373,432.555 1025.373,431.965 1025.69,431.648 v1(1025.779,431.648)
NetD14_2: D14.2 U7.7 | length 4.5
  Top Layer w0.254: v1(1023.391,434.873) 1023.765,434.5 D14.2@1024.96,434.5
  Bottom Layer w0.254: v1(1023.391,434.873) 1024.44,433.825 U7.7@1025.725,433.825
NetD14_3: D14.3 U7.6 | length 4.8
  Top Layer w0.254: D14.3@1024.96,436 1026.303,436 v1(1027.455,434.848)
  Bottom Layer w0.254: U7.6@1025.725,435.095 1027.208,435.095 v1(1027.455,434.848)
NetD15_1: D15.1 U8.3 | length 4
  Top Layer w0.254: v1(1023.409,427.905) 1023.814,427.5 D15.1@1024.96,427.5
  Bottom Layer w0.254: v1(1023.409,427.905) U8.3@1025.725,427.905
NetD15_2: D15.2 U8.2 | length 3.1
  Top Layer w0.254: D15.2@1024.96,429 v1(1026.84,429)
  Bottom Layer w0.254: U8.2@1025.725,429.175 1026.665,429.175 v1(1026.84,429)
NetD15_3: D15.3 U8.1 | length 2.5
  Top Layer w0.254: D15.3@1024.96,430.5 1025.042,430.5 v1(1025.042,431.419)
  Bottom Layer w0.254: v1(1025.042,431.419) 1025.296,431.165 1025.296,430.445 U8.1@1025.725,430.445
NetD16_1: D16.1 U8.8 | length 3.1
  Top Layer w0.254: D16.1@1024.96,422 1025.373,422 v1(1025.373,420.624)
  Bottom Layer w0.254: v1(1025.373,420.624) 1025.373,421.555 U8.8@1025.725,421.555
NetD16_2: D16.2 U8.7 | length 4.5
  Top Layer w0.254: D16.2@1024.96,423.5 v1(1027.43,423.5)
  Bottom Layer w0.254: U8.7@1025.725,422.825 1026.755,422.825 v1(1027.43,423.5)
NetD16_3: D16.3 U8.6 | length 5
  Top Layer w0.254: v1(1023.01,424.095) 1023.915,425 D16.3@1024.96,425
  Bottom Layer w0.254: v1(1023.01,424.095) U8.6@1025.725,424.095
NetD17_1: D17.1 U9.3 | length 4
  Top Layer w0.254: v1(1023.408,416.905) 1023.813,416.5 D17.1@1024.96,416.5
  Bottom Layer w0.254: v1(1023.408,416.905) U9.3@1025.725,416.905
NetD17_2: D17.2 U9.2 | length 3.8
  Top Layer w0.254: v1(1023.499,418.175) 1023.674,418 D17.2@1024.96,418
  Bottom Layer w0.254: v1(1023.499,418.175) U9.2@1025.725,418.175
NetD17_3: D17.3 U9.1 | length 3.4
  Top Layer w0.254: v1(1023.645,419.445) 1023.7,419.5 D17.3@1024.96,419.5
  Bottom Layer w0.254: v1(1023.645,419.445) U9.1@1025.725,419.445
NetD18_1: D18.1 U9.8 | length 3.8
  Top Layer w0.254: v1(1023.556,410.527) 1024.029,411 D18.1@1024.96,411
  Bottom Layer w0.254: v1(1023.556,410.527) 1023.584,410.555 U9.8@1025.725,410.555
NetD18_2: D18.2 U9.7 | length 3.6
  Top Layer w0.254: v1(1023.671,411.825) 1024.346,412.5 D18.2@1024.96,412.5
  Bottom Layer w0.254: v1(1023.671,411.825) U9.7@1025.725,411.825
NetD18_3: D18.3 U9.6 | length 4.5
  Top Layer w0.254: v1(1023.391,413.095) 1023.976,413.679 1023.976,414 D18.3@1024.96,414
  Bottom Layer w0.254: v1(1023.391,413.095) U9.6@1025.725,413.095
NetD19_1: D19.1 U10.3 | length 4
  Top Layer w0.254: v1(1023.406,405.905) 1023.811,405.5 D19.1@1024.96,405.5
  Bottom Layer w0.254: v1(1023.406,405.905) U10.3@1025.725,405.905
NetD19_2: D19.2 U10.2 | length 3.8
  Top Layer w0.254: v1(1023.645,407.467) 1023.645,407.365 1024.011,407 D19.2@1024.96,407
  Bottom Layer w0.254: v1(1023.645,407.467) 1023.937,407.175 U10.2@1025.725,407.175
NetD19_3: D19.3 U10.1 | length 2.5
  Top Layer w0.254: D19.3@1024.96,408.5 1025.068,408.5 1025.068,409.169 v1(1025.296,409.397)
  Bottom Layer w0.254: v1(1025.296,409.397) 1025.296,408.445 U10.1@1025.725,408.445
NetD20_1: D20.1 U10.8 | length 3.1
  Top Layer w0.254: D20.1@1024.96,400 1025.373,400 v1(1025.373,398.628)
  Bottom Layer w0.254: v1(1025.373,398.628) 1025.373,399.555 U10.8@1025.725,399.555
NetD20_2: D20.2 U10.7 | length 4.5
  Top Layer w0.254: D20.2@1024.96,401.5 v1(1027.43,401.5)
  Bottom Layer w0.254: U10.7@1025.725,400.825 1026.755,400.825 v1(1027.43,401.5)
NetD20_3: D20.3 U10.6 | length 5
  Top Layer w0.254: v1(1023.01,402.095) 1023.915,403 D20.3@1024.96,403
  Bottom Layer w0.254: v1(1023.01,402.095) U10.6@1025.725,402.095
NetD21_1: D21.1 U11.3 | length 4
  Top Layer w0.254: v1(1023.404,394.905) 1023.809,394.5 D21.1@1024.96,394.5
  Bottom Layer w0.254: v1(1023.404,394.905) U11.3@1025.725,394.905
NetD21_2: D21.2 U11.2 | length 3.8
  Top Layer w0.254: v1(1023.497,396.175) 1023.672,396 D21.2@1024.96,396
  Bottom Layer w0.254: v1(1023.497,396.175) U11.2@1025.725,396.175
NetD21_3: D21.3 U11.1 | length 3.4
  Top Layer w0.254: v1(1023.645,397.445) 1023.7,397.5 D21.3@1024.96,397.5
  Bottom Layer w0.254: v1(1023.645,397.445) U11.1@1025.725,397.445
NetD22_1: D22.1 U11.8 | length 4.4
  Top Layer w0.254: v1(1023.214,388.671) 1023.543,389 D22.1@1024.96,389
  Bottom Layer w0.254: v1(1023.214,388.671) 1023.329,388.555 U11.8@1025.725,388.555
NetD22_2: D22.2 U11.7 | length 3.4
  Top Layer w0.254: D22.2@1024.96,390.5 v1(1026.795,390.5)
  Bottom Layer w0.254: U11.7@1025.725,389.825 1026.566,389.825 1026.795,390.054 v1(1026.795,390.5)
NetD22_3: D22.3 U11.6 | length 5
  Top Layer w0.254: v1(1023.01,391.095) 1023.915,392 D22.3@1024.96,392
  Bottom Layer w0.254: v1(1023.01,391.095) U11.6@1025.725,391.095
NetD23_1: D23.1 U12.3 | length 4.4
  Top Layer w0.254: D23.1@1024.96,383.5 1027.339,383.5 v1(1027.455,383.616)
  Bottom Layer w0.254: U12.3@1025.725,383.905 1027.167,383.905 v1(1027.455,383.616)
NetD23_2: D23.2 U12.2 | length 8
  Top Layer w0.254: v1(1023.798,387.858) 1023.798,385 D23.2@1024.96,385
  Bottom Layer w0.254: v1(1023.798,387.858) 1023.798,386.318 1024.941,385.175 U12.2@1025.725,385.175
NetD23_3: D23.3 U12.1 | length 2.6
  Top Layer w0.254: D23.3@1024.96,386.5 1025.195,386.5 v1(1025.195,387.401)
  Bottom Layer w0.254: v1(1025.195,387.401) 1025.195,386.445 U12.1@1025.725,386.445
NetD24_1: D24.1 U12.8 | length 3.2
  Top Layer w0.254: D24.1@1024.96,378 1024.941,378 1024.941,376.86 v1(1025.347,376.453)
  Bottom Layer w0.254: v1(1025.347,376.453) 1025.347,377.555 U12.8@1025.725,377.555
NetD24_2: D24.2 U12.7 | length 4.5
  Top Layer w0.254: v1(1023.391,379.857) 1023.748,379.5 D24.2@1024.96,379.5
  Bottom Layer w0.254: v1(1023.391,379.857) 1024.423,378.825 U12.7@1025.725,378.825
NetD24_3: D24.3 U12.6 | length 4.6
  Top Layer w0.254: D24.3@1024.96,381 1026.922,381 v1(1027.455,380.467)
  Bottom Layer w0.254: U12.6@1025.725,380.095 1027.084,380.095 v1(1027.455,380.467)
NetD25_1: D25.1 U13.3 | length 4.1
  Top Layer w0.254: v1(1023.485,372.186) 1023.799,372.5 D25.1@1024.96,372.5
  Bottom Layer w0.254: v1(1023.485,372.186) 1024.204,372.905 U13.3@1025.725,372.905
NetD25_2: D25.2 U13.2 | length 5.5
  Top Layer w0.254: v1(1022.985,373.187) 1023.798,374 D25.2@1024.96,374
  Bottom Layer w0.254: v1(1022.985,373.187) 1023.973,374.175 U13.2@1025.725,374.175
NetD25_3: D25.3 U13.1 | length 5.7
  Top Layer w0.254: v1(1023.163,374.193) 1023.925,374.955 1023.925,375.5 D25.3@1024.96,375.5
  Bottom Layer w0.254: v1(1023.163,374.193) 1023.181,374.193 1024.433,375.445 U13.1@1025.725,375.445
NetD26_1: D26.1 U13.8 | length 3.4
  Top Layer w0.254: D26.1@1024.96,367 1025.373,367 1025.373,366.039 v1(1025.779,365.633)
  Bottom Layer w0.254: U13.8@1025.725,366.555 1025.373,366.555 1025.373,366.039 v1(1025.779,365.633)
NetD26_2: D26.2 U13.7 | length 4.5
  Top Layer w0.254: D26.2@1024.96,368.5 v1(1027.43,368.5)
  Bottom Layer w0.254: U13.7@1025.725,367.825 1026.755,367.825 v1(1027.43,368.5)
NetD26_3: D26.3 U13.6 | length 5
  Top Layer w0.254: v1(1023.01,369.095) 1023.915,370 D26.3@1024.96,370
  Bottom Layer w0.254: v1(1023.01,369.095) U13.6@1025.725,369.095
NetD27_1: D27.1 U14.3 | length 3.3
  Top Layer w0.254: D27.1@1024.96,361.5 1026.737,361.5 v1(1026.846,361.391)
  Bottom Layer w0.254: U14.3@1025.725,361.905 1025.982,361.905 1026.496,361.391 v1(1026.846,361.391)
NetD27_2: D27.2 U14.2 | length 8.3
  Top Layer w0.254: v1(1024.814,365.455) 1024.636,365.277 1023.798,365.277 1023.798,363 D27.2@1024.96,363
  Bottom Layer w0.254: v1(1024.814,365.455) 1024.026,364.668 1024.026,364.089 1024.941,363.175 U14.2@1025.725,363.175
NetD27_3: D27.3 U14.1 | length 4.2
  Top Layer w0.254: D27.3@1024.96,364.5 v1(1027.43,364.5)
  Bottom Layer w0.254: U14.1@1025.725,364.445 1027.375,364.445 v1(1027.43,364.5)
NetD28_1: D28.1 U14.8 | length 3.1
  Top Layer w0.254: D28.1@1024.96,356 1025.373,356 v1(1025.373,354.635)
  Bottom Layer w0.254: v1(1025.373,354.635) 1025.373,355.555 U14.8@1025.725,355.555
NetD28_2: D28.2 U14.7 | length 3.4
  Top Layer w0.254: D28.2@1024.96,357.5 v1(1026.795,357.5)
  Bottom Layer w0.254: U14.7@1025.725,356.825 1026.566,356.825 1026.795,357.054 v1(1026.795,357.5)
NetD28_3: D28.3 U14.6 | length 5
  Top Layer w0.254: v1(1023.01,358.095) 1023.915,359 D28.3@1024.96,359
  Bottom Layer w0.254: v1(1023.01,358.095) U14.6@1025.725,358.095
NetD29_1: D29.1 U15.3 | length 3.4
  Top Layer w0.254: D29.1@1024.96,350.5 v1(1026.947,350.5)
  Bottom Layer w0.254: U15.3@1025.725,350.905 1026.542,350.905 v1(1026.947,350.5)
NetD29_2: D29.2 U15.2 | length 3.7
  Top Layer w0.254: v1(1023.506,352.175) 1023.681,352 D29.2@1024.96,352
  Bottom Layer w0.254: v1(1023.506,352.175) U15.2@1025.725,352.175
NetD29_3: D29.3 U15.1 | length 3.4
  Top Layer w0.254: v1(1023.645,353.445) 1023.7,353.5 D29.3@1024.96,353.5
  Bottom Layer w0.254: v1(1023.645,353.445) U15.1@1025.725,353.445
NetD30_1: D30.1 U15.8 | length 3.4
  Top Layer w0.254: D30.1@1024.96,345 1025.373,345 1025.373,344.043 v1(1025.779,343.637)
  Bottom Layer w0.254: U15.8@1025.725,344.555 1025.373,344.555 1025.373,344.043 v1(1025.779,343.637)
NetD30_2: D30.2 U15.7 | length 4.5
  Top Layer w0.254: D30.2@1024.96,346.5 v1(1027.43,346.5)
  Bottom Layer w0.254: U15.7@1025.725,345.825 1026.755,345.825 v1(1027.43,346.5)
NetD30_3: D30.3 U15.6 | length 5
  Top Layer w0.254: v1(1023.01,347.095) 1023.915,348 D30.3@1024.96,348
  Bottom Layer w0.254: v1(1023.01,347.095) U15.6@1025.725,347.095
NetD31_1: D31.1 U16.3 | length 3.3
  Top Layer w0.254: D31.1@1024.96,339.5 1026.715,339.5 v1(1026.846,339.369)
  Bottom Layer w0.254: U16.3@1025.725,339.905 1025.982,339.905 1026.518,339.369 v1(1026.846,339.369)
NetD31_2: D31.2 U16.2 | length 5.1
  Top Layer w0.254: v1(1023.076,341.721) 1023.798,341 D31.2@1024.96,341
  Bottom Layer w0.254: v1(1023.076,341.721) 1023.623,341.175 U16.2@1025.725,341.175
NetD31_3: D31.3 U16.1 | length 4.2
  Top Layer w0.254: D31.3@1024.96,342.5 v1(1027.43,342.5)
  Bottom Layer w0.254: U16.1@1025.725,342.445 1027.375,342.445 v1(1027.43,342.5)
NetD32_1: D32.1 U16.8 | length 3.2
  Top Layer w0.254: D32.1@1024.96,334 1024.941,334 1024.941,332.867 v1(1025.347,332.461)
  Bottom Layer w0.254: v1(1025.347,332.461) 1025.347,333.555 U16.8@1025.725,333.555
NetD32_2: D32.2 U16.7 | length 3.4
  Top Layer w0.254: D32.2@1024.96,335.5 v1(1026.795,335.5)
  Bottom Layer w0.254: U16.7@1025.725,334.825 1026.566,334.825 1026.795,335.054 v1(1026.795,335.5)
NetD32_3: D32.3 U16.6 | length 5
  Top Layer w0.254: v1(1023.01,336.095) 1023.915,337 D32.3@1024.96,337
  Bottom Layer w0.254: v1(1023.01,336.095) U16.6@1025.725,336.095
NetD33_1: D33.1 U17.3 | length 3.4
  Top Layer w0.254: D33.1@1024.96,328.5 1026.717,328.5 v1(1026.846,328.371)
  Bottom Layer w0.254: U17.3@1025.725,328.905 1026.516,328.905 1026.516,328.701 v1(1026.846,328.371)
NetD33_2: D33.2 U17.2 | length 4.7
  Top Layer w0.254: D33.2@1024.96,330 1026.995,330 v1(1027.455,329.54)
  Bottom Layer w0.254: U17.2@1025.725,330.175 1026.82,330.175 v1(1027.455,329.54)
NetD33_3: D33.3 U17.1 | length 3.6
  Top Layer w0.254: D33.3@1024.96,331.5 1026.241,331.5 v1(1026.795,332.054)
  Bottom Layer w0.254: U17.1@1025.725,331.445 1026.566,331.445 1026.795,331.674 v1(1026.795,332.054)
NetD34_1: D34.1 U17.8 | length 4.4
  Top Layer w0.254: D34.1@1024.96,323 v1(1027.43,323)
  Bottom Layer w0.254: U17.8@1025.725,322.555 1026.985,322.555 v1(1027.43,323)
NetD34_2: D34.2 U17.7 | length 5
  Top Layer w0.254: v1(1023.01,324.536) 1023.046,324.5 D34.2@1024.96,324.5
  Bottom Layer w0.254: v1(1023.01,324.536) 1023.721,323.825 U17.7@1025.725,323.825
NetD34_3: D34.3 U17.6 | length 6.2
  Top Layer w0.254: v1(1022.426,326) D34.3@1024.96,326
  Bottom Layer w0.254: v1(1022.426,326) 1023.331,325.095 U17.6@1025.725,325.095
NetD35_1: D35.1 U18.3 | length 3.3
  Top Layer w0.254: D35.1@1024.96,317.5 1026.719,317.5 v1(1026.846,317.373)
  Bottom Layer w0.254: U18.3@1025.725,317.905 1025.982,317.905 1026.514,317.373 v1(1026.846,317.373)
NetD35_2: D35.2 U18.2 | length 4.2
  Top Layer w0.254: D35.2@1024.96,319 1027.255,319 v1(1027.43,319.175)
  Bottom Layer w0.254: U18.2@1025.725,319.175 v1(1027.43,319.175)
NetD35_3: D35.3 U18.1 | length 2.7
  Top Layer w0.254: v1(1024.814,321.412) 1024.814,320.5 D35.3@1024.96,320.5
  Bottom Layer w0.254: v1(1024.814,321.412) 1024.941,321.412 1025.296,321.056 1025.296,320.445 U18.1@1025.725,320.445